# Altium PCB AX309.REV.1.0.PcbDoc (part 5 of 10)
Units mil, origin at the board's own origin, x right, y up, seen from the top; angles counter-clockwise.
Board outline 5185 x 3614 mil, 4 copper layers (Top Layer, GND, Mid-Layer 1, Bottom Layer); 191 components, 352 nets, 1106 pads, 425 vias.
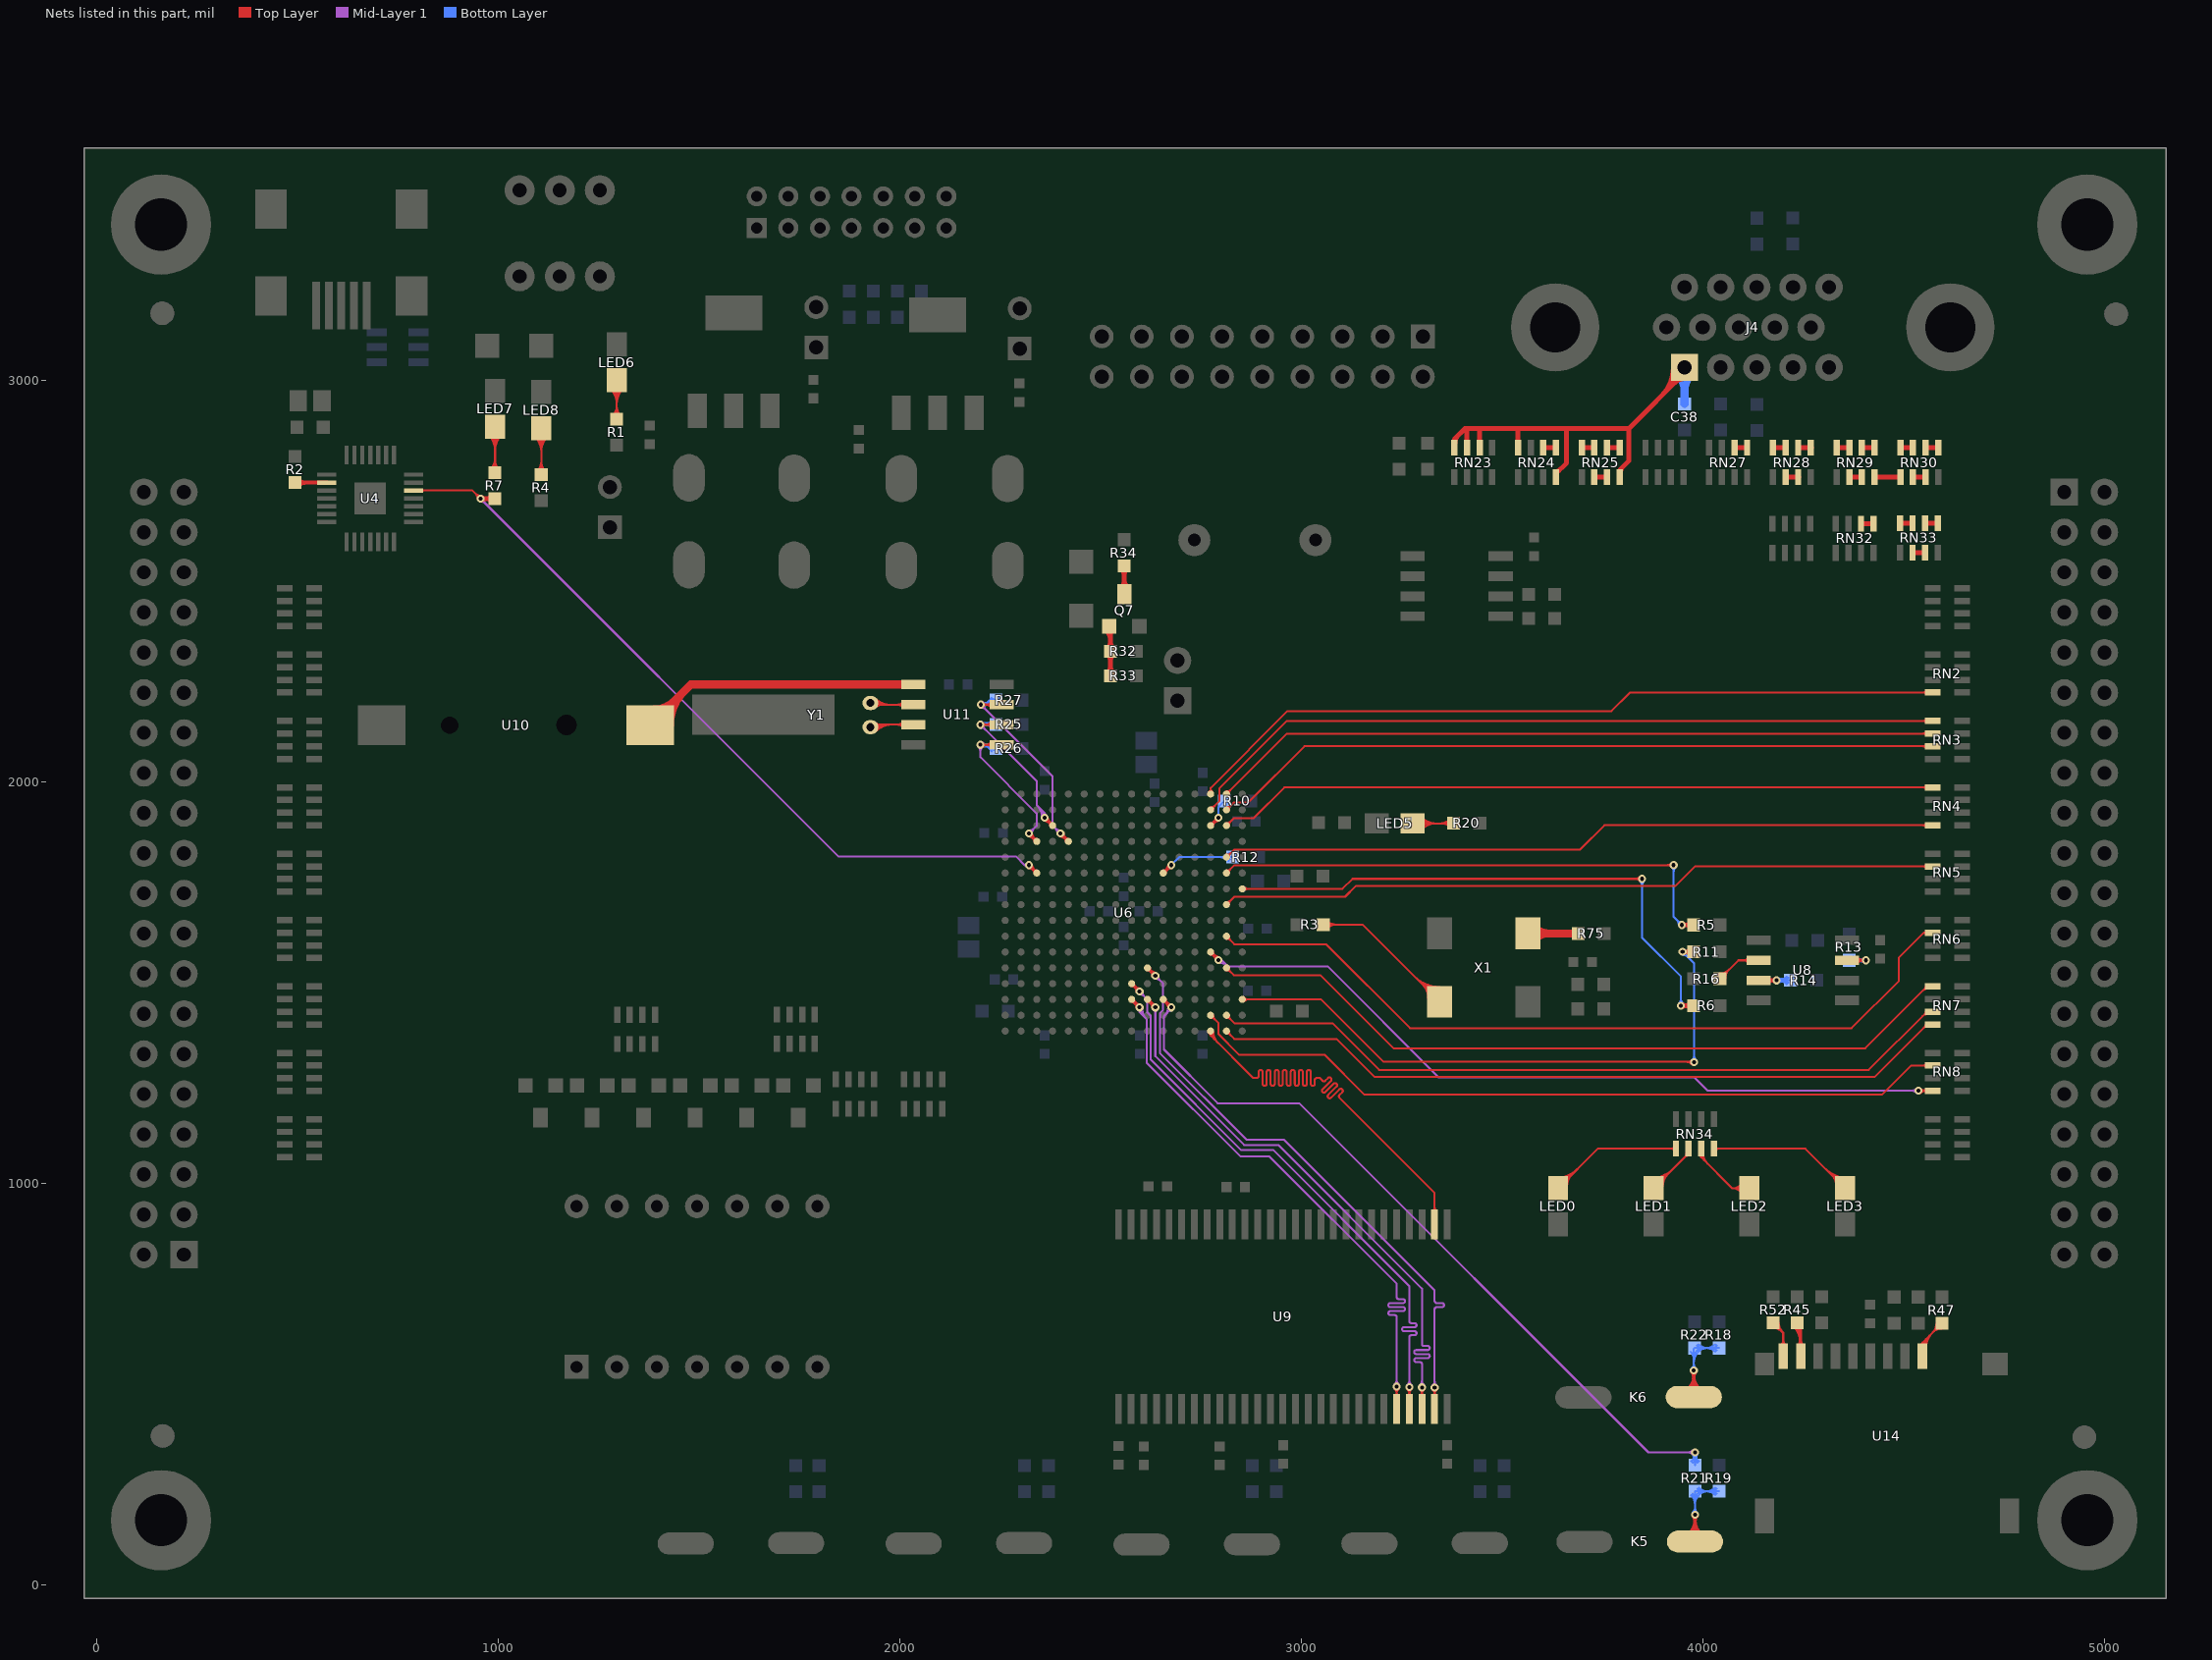
[diagram p7: the nets of this part, all layers, seen from the top]

## Via types
v1: diameter 20, hole 10, Top Layer to Bottom Layer, 328 vias
v2: diameter 30, hole 15, Top Layer to Bottom Layer, 95 vias
v3: diameter 40, hole 20, Top Layer to Bottom Layer, 2 vias

## Nets (pads, with @x,y where several pads share a name; then routed paths per layer and width w, separated by ;. In a path a pad name is that pad's centre, name@x,y a point inside that pad or via, vN(x,y) a via of type N, cw(c..) or ccw(c..) an arc to the next point about the centre after c; other vN are vias at no path point) (continued)
NetK5_1: K5.1 R19.2 R21.2 | length 782.9
  Top Layer w5: K5.1@3963.28,124.72 ccw(c3920.5,167.5) 3981,167.5 ccw(c4041.5,167.5) K5.1@3998.72,124.72 ; K5.1@3966.82,121.18 ccw(c3932.57,155.43) 3981,155.43 ccw(c4029.43,155.43) K5.1@3995.18,121.18 ; K5.1@3970.35,117.65 ccw(c3944.64,143.36) 3981,143.36 ccw(c4017.36,143.36) K5.1@3991.65,117.65 ; v1@3974.95,169.57 cw(c3957.6,156.87) 3978.85,153.58 ; v1@3975.7,168.7 cw(c3962.89,155.89) 3981,155.89 cw(c3999.11,155.89) v1@3986.3,168.7 ; v1@3976.57,167.95 cw(c3967.88,156.08) 3982.42,158.33 ; K5.1@3977,103 K5.1@3981,107 v1(3981,174) ; 3979.58,158.33 cw(c3994.12,156.08) v1@3985.43,167.95 ; 3983.15,153.58 cw(c4004.4,156.87) v1@3987.05,169.57
  Bottom Layer w5: R21.2@3971.45,222.45 cw(c3948.41,199.41) 3981,199.41 cw(c4013.59,199.41) 3990.55,222.45 cw(c4013.59,199.41) 4013.59,232 cw(c4013.59,264.59) R21.2@3990.55,241.55 ; R21.2@3974.99,225.99 cw(c3960.48,211.48) 3981,211.48 cw(c4001.52,211.48) 3987.01,225.99 cw(c4001.52,211.48) 4001.52,232 cw(c4001.52,252.52) R21.2@3987.01,238.01 ; v1@3975.7,179.3 ccw(c3962.89,192.11) 3981,192.11 ccw(c3999.11,192.11) v1@3986.3,179.3 ; v1(3981,174) R21.2@3981,232 R19.2@4041,232 ; R19.2@4031.45,222.45 ccw(c4008.41,199.41) 4008.41,232 ccw(c4008.41,264.59) R19.2@4031.45,241.55 ; R19.2@4034.99,225.99 ccw(c4020.48,211.48) 4020.48,232 ccw(c4020.48,252.52) R19.2@4034.99,238.01
NetK6_2: K6.2 R18.2 R22.2 | length 765.3
  Top Layer w5: K6.2@3960.28,484.72 ccw(c3917.5,527.5) 3978,527.5 ccw(c4038.5,527.5) K6.2@3995.72,484.72 ; K6.2@3963.82,481.18 ccw(c3929.57,515.43) 3978,515.43 ccw(c4026.43,515.43) K6.2@3992.18,481.18 ; K6.2@3967.35,477.65 ccw(c3941.64,503.36) 3978,503.36 ccw(c4014.36,503.36) K6.2@3988.65,477.65 ; v1@3971.91,528.62 cw(c3954.75,516.28) 3975.61,512.87 ; v1@3972.7,527.7 cw(c3959.89,514.89) 3978,514.89 cw(c3996.11,514.89) v1@3983.3,527.7 ; v1@3973.62,526.91 cw(c3964.82,514.67) 3979.7,517.1 ; 3976.3,517.1 cw(c3991.18,514.67) v1@3982.38,526.91 ; K6.2@3978,467 v1(3978,533) ; 3980.39,512.87 cw(c4001.25,516.28) v1@3984.09,528.62
  Bottom Layer w5: R22.2@3970.45,579.45 cw(c3952.24,561.24) 3978,561.24 ; v1@3972.7,538.3 ccw(c3959.89,551.11) 3978,551.11 ccw(c3996.11,551.11) v1@3983.3,538.3 ; v1(3978,533) 3978,587 R22.2@3980,589 R18.2@4041,589 ; 3978,551.58 cw(c4017.42,551.58) 3989.55,579.45 cw(c4012.59,556.41) 4012.59,589 cw(c4012.59,621.59) R22.2@3989.55,598.55 ; 3978,563.65 cw(c4005.35,563.65) 3986.01,582.99 cw(c4000.52,568.48) 4000.52,589 cw(c4000.52,609.52) R22.2@3986.01,595.01 ; R18.2@4031.45,579.45 ccw(c4008.41,556.41) 4008.41,589 ccw(c4008.41,621.59) R18.2@4031.45,598.55 ; R18.2@4034.99,582.99 ccw(c4020.48,568.48) 4020.48,589 ccw(c4020.48,609.52) R18.2@4034.99,595.01
NetLED0_1: LED0.1 RN34.5 | length 578.7
  Top Layer w5: LED0.1@3640,987 3738.85,1085.85 RN34.5@3933.51,1085.85 RN34.5@3933.51,1070.51 ; LED0.1@3640,999.5 ccw(c3640,1029.68) LED0.1@3661.34,1008.34 ; LED0.1@3640,1004.5 ccw(c3640,1046.75) 3669.87,1016.87 ; LED0.1@3640,1009.5 ccw(c3640,1063.82) 3678.41,1025.41 ; LED0.1@3640,1014.5 ccw(c3640,1080.89) 3686.95,1033.95 ; LED0.1@3657.5,992 cw(c3687.68,992) 3666.34,1013.34 ; LED0.1@3662.5,992 cw(c3704.75,992) 3674.87,1021.87 ; RN34.5@3929.71,1082.05 ccw(c3920.54,1072.88) 3920.54,1085.85 ccw(c3920.54,1098.82) RN34.5@3929.71,1089.65
NetLED1_1: LED1.1 RN34.6 | length 363.7
  Top Layer w5: LED1.1@3878.33,987 3965.01,1073.67 RN34.6@3965.01,1085.85 ; LED1.1@3878.33,999.5 ccw(c3878.33,1029.68) LED1.1@3899.67,1008.34 ; LED1.1@3878.33,1004.5 ccw(c3878.33,1046.75) 3908.21,1016.87 ; LED1.1@3878.33,1009.5 ccw(c3878.33,1063.82) 3916.74,1025.41 ; LED1.1@3878.33,1014.5 ccw(c3878.33,1080.89) 3925.28,1033.95 ; LED1.1@3895.83,992 cw(c3926.01,992) 3904.67,1013.34 ; LED1.1@3900.83,992 cw(c3943.08,992) 3913.21,1021.87 ; 3955.58,1064.24 ccw(c3945.78,1074.04) RN34.6@3959.63,1074.04 ; 3956.46,1065.12 cw(c3965.01,1056.57) RN34.6@3965.01,1068.66
NetLED2_1: LED2.1 RN34.7 | length 355.3
  Top Layer w5: RN34.7@3991.88,1074.04 ccw(c4003.75,1074.04) 3995.35,1065.65 ; RN34.7@3993.72,1069.44 cw(c3990.72,1064.5) 3996.5,1064.5 ; RN34.7@3996.5,1085.85 3996.5,1064.5 ; RN34.7@3996.88,1074.04 ccw(c4020.82,1074.04) 4003.89,1057.11 ; RN34.7@3999.29,1069.44 ccw(c4002.29,1064.5) 3996.5,1064.5 ; RN34.7@4001.88,1074.04 ccw(c4037.89,1074.04) 4012.43,1048.57 ; LED2.1@4098.1,974.29 ccw(c4074,957.8) 4074,987 ; LED2.1@4098.1,999.71 cw(c4074,1016.2) 4074,987 ; LED2.1@4102.23,977.12 ccw(c4083.48,964.29) 4083.48,987 ccw(c4083.48,1009.71) LED2.1@4102.23,996.88 ; LED2.1@4129.33,987 LED2.1@4116.67,987 4074,987 ; 3996.5,1064.5 4074,987
NetLED3_1: LED3.1 RN34.8 | length 606.7
  Top Layer w5: RN34.8@4028,1076 RN34.8@4028,1085.85 4256.15,1085.85 LED3.1@4355,987 ; RN34.8@4031.8,1082.05 cw(c4040.97,1072.88) 4040.97,1085.85 cw(c4040.97,1098.82) RN34.8@4031.8,1089.65 ; 4308.05,1033.95 ccw(c4355,1080.89) LED3.1@4355,1014.5 ; 4316.59,1025.41 ccw(c4355,1063.82) LED3.1@4355,1009.5 ; 4320.13,1021.87 cw(c4290.25,992) LED3.1@4332.5,992 ; 4325.13,1016.87 ccw(c4355,1046.75) LED3.1@4355,1004.5 ; 4328.66,1013.34 cw(c4307.32,992) LED3.1@4337.5,992 ; LED3.1@4333.66,1008.34 ccw(c4355,1029.68) LED3.1@4355,999.5
NetLED5_2: LED5.2 R20.2 | length 384.5
  Top Layer w5: LED5.2@3278,1896 R20.2@3380,1896 ; LED5.2@3291.84,1887.16 cw(c3313.18,1865.82) 3313.18,1896 cw(c3313.18,1926.18) LED5.2@3291.84,1904.84 ; LED5.2@3295.37,1883.63 cw(c3325.25,1853.75) 3325.25,1896 cw(c3325.25,1938.25) LED5.2@3295.37,1908.37 ; LED5.2@3298.91,1880.09 cw(c3337.32,1841.68) 3337.32,1896 cw(c3337.32,1950.32) LED5.2@3298.91,1911.91 ; 3344.99,1896 ccw(c3344.99,1932.01) R20.2@3370.45,1906.55 ; 3349.82,1896 cw(c3349.82,1866.82) R20.2@3370.45,1887.45 ; 3357.06,1896 ccw(c3357.06,1919.93) R20.2@3373.99,1903.01 ; 3361.89,1896 cw(c3361.89,1878.89) R20.2@3373.99,1890.99
NetLED6_1: LED6.1 R1.2 | length 379.5
  Top Layer w5: LED6.1@1279.09,2979.09 cw(c1240.68,2940.68) 1295,2940.68 cw(c1349.32,2940.68) LED6.1@1310.91,2979.09 ; LED6.1@1282.63,2982.63 cw(c1252.75,2952.75) 1295,2952.75 cw(c1337.25,2952.75) LED6.1@1307.37,2982.63 ; R1.2@1285.45,2912.55 ccw(c1262.41,2935.59) 1295,2935.59 ccw(c1327.59,2935.59) R1.2@1304.55,2912.55 ; LED6.1@1286.16,2986.16 cw(c1264.82,2964.82) 1295,2964.82 cw(c1325.18,2964.82) LED6.1@1303.84,2986.16 ; R1.2@1288.99,2909.01 ccw(c1274.48,2923.52) 1295,2923.52 ccw(c1315.52,2923.52) R1.2@1301.01,2909.01 ; R1.2@1295,2903 LED6.1@1295,3000
NetLED7_2: LED7.2 R7.2 | length 395.5
  Top Layer w5: LED7.2@976.09,2863.09 cw(c937.68,2824.68) 992,2824.68 cw(c1046.32,2824.68) LED7.2@1007.91,2863.09 ; LED7.2@979.63,2866.63 cw(c949.75,2836.75) 992,2836.75 cw(c1034.25,2836.75) LED7.2@1004.37,2866.63 ; R7.2@981.45,2779.55 ccw(c955.99,2805.01) 992,2805.01 ; LED7.2@983.16,2870.16 cw(c961.82,2848.82) 992,2848.82 cw(c1022.18,2848.82) LED7.2@1000.84,2870.16 ; R7.2@984.99,2776.01 ccw(c968.07,2792.93) 992,2792.93 ; R7.2@992,2771 LED7.2@992,2884 ; 992,2788.11 ccw(c1009.11,2788.11) R7.2@997.01,2776.01 ; 992,2800.18 ccw(c1021.18,2800.18) R7.2@1000.55,2779.55
NetLED8_2: LED8.2 R4.2 | length 398.2
  Top Layer w5: LED8.2@1091.09,2860.09 cw(c1052.68,2821.68) 1107,2821.68 cw(c1161.32,2821.68) LED8.2@1122.91,2860.09 ; LED8.2@1094.63,2863.63 cw(c1064.75,2833.75) 1107,2833.75 cw(c1149.25,2833.75) LED8.2@1119.37,2863.63 ; R4.2@1097.45,2774.85 ccw(c1074.41,2797.89) 1107,2797.89 ccw(c1139.59,2797.89) R4.2@1116.55,2774.85 ; LED8.2@1098.16,2867.16 cw(c1076.82,2845.82) 1107,2845.82 cw(c1137.18,2845.82) LED8.2@1115.84,2867.16 ; R4.2@1100.99,2771.31 ccw(c1086.48,2785.82) 1107,2785.82 ccw(c1127.52,2785.82) R4.2@1113.01,2771.31 ; R4.2@1107,2765.3 LED8.2@1107,2881
NetQ7_1: Q7.1 R32.2 R33.2 | length 279.3
  Top Layer w12: Q7.1@2513.51,2378.51 cw(c2485.79,2350.79) 2525,2350.79 ; R33.2@2517.93,2271.07 ccw(c2500.86,2288.14) 2525,2288.14 ccw(c2549.14,2288.14) R33.2@2532.07,2271.07 ; R32.2@2517.93,2317.93 cw(c2500.86,2300.86) 2525,2300.86 cw(c2549.14,2300.86) R32.2@2532.07,2317.93 ; R32.2@2517.93,2332.07 ccw(c2500.86,2349.14) 2525,2349.14 ccw(c2549.14,2349.14) R32.2@2532.07,2332.07 ; R33.2@2525,2264 R32.2@2525,2325 Q7.1@2525,2384 ; 2525,2365.27 cw(c2543.73,2365.27) Q7.1@2530.49,2378.51
NetQ7_3: Q7.3 R34.1 | length 153.4
  Top Layer w12: Q7.3@2551.51,2482.49 ccw(c2533.44,2500.56) 2559,2500.56 ; R34.1@2551.93,2530.93 cw(c2534.86,2513.86) 2559,2513.86 cw(c2583.14,2513.86) R34.1@2566.07,2530.93 ; Q7.3@2559,2468 R34.1@2559,2538 ; 2559,2505.38 ccw(c2591.38,2505.38) Q7.3@2568.49,2482.49
NetR2_1: R2.1 U4.9 | length 120.3
  Top Layer w10: R2.1@494.1,2745.1 U4.9@572.68,2745.1 ; R2.1@501.78,2737.22 cw(c520.8,2718.2) 520.8,2745.1 ; R2.1@501.78,2752.78 ccw(c520.31,2771.31) 520.31,2745.1
NetR3_2: R3.2 X1.3 | length 799.4
  Top Layer w5: R3.2@3055,1644 3153,1644 X1.3@3345,1452 ; R3.2@3061.01,1637.99 cw(c3075.52,1623.48) 3075.52,1644 cw(c3075.52,1664.52) R3.2@3061.01,1650.01 ; R3.2@3064.55,1634.45 cw(c3087.59,1611.41) 3087.59,1644 cw(c3087.59,1676.59) R3.2@3064.55,1653.55 ; 3282.06,1514.94 ccw(c3345,1577.88) X1.3@3345,1488.87 ; 3290.59,1506.41 ccw(c3345,1560.81) X1.3@3345,1483.87 ; 3299.13,1497.87 ccw(c3345,1543.74) X1.3@3345,1478.87 ; 3301.07,1495.93 cw(c3265.01,1459.87) X1.3@3316,1459.87 ; 3307.67,1489.33 ccw(c3345,1526.67) X1.3@3345,1473.87 ; 3309.6,1487.4 cw(c3282.08,1459.87) X1.3@3321,1459.87 ; X1.3@3316.2,1480.8 ccw(c3345,1509.6) X1.3@3345,1468.87 ; X1.3@3318.14,1478.86 cw(c3299.15,1459.87) X1.3@3326,1459.87
NetR5_1: R5.1 U6.R11 | length 1556.1
  Top Layer w5: U6.R11@2813.91,1772.43 2833.59,1792.11 v1(3927.89,1792.11) ; U6.R11@2813.91,1778.78 ccw(c2813.91,1794.13) 2824.76,1783.28 ccw(c2835.61,1772.43) U6.R11@2820.26,1772.43 ; v1@3922.59,1786.81 ccw(c3909.78,1774) 3909.78,1792.11 ccw(c3909.78,1810.22) v1@3922.59,1797.41 ; v1@3953.04,1637.44 cw(c3958.99,1630.87) 3961.29,1639.44 cw(c3963.59,1648.01) v1@3955.14,1645.29 ; v1@3953.04,1648.56 ccw(c3958.99,1655.13) 3961.29,1646.56 ccw(c3963.59,1637.99) v1@3955.14,1640.71 ; v1@3953.3,1637.7 cw(c3966.11,1624.89) 3966.11,1643 cw(c3966.11,1661.11) v1@3953.3,1648.3 ; R5.1@3967.9,1634.05 ccw(c3948,1616.42) v1(3948,1643) ; R5.1@3967.9,1651.95 cw(c3948,1669.58) v1(3948,1643) ; R5.1@3971.64,1637.36 ccw(c3959.11,1626.26) 3959.11,1643 ccw(c3959.11,1659.74) R5.1@3971.64,1648.64 ; R5.1@3978,1643 v1(3948,1643)
  Bottom Layer w5: v1@3922.59,1786.81 cw(c3909.78,1774) 3927.89,1774 cw(c3946,1774) v1@3933.19,1786.81 ; v1(3927.89,1792.11) 3927.89,1663.11 v1(3948,1643) ; v1@3940.5,1643 ccw(c3922.39,1643) 3935.2,1655.8 ccw(c3948,1668.61) v1@3948,1650.5
NetR6_1: R6.1 U6.T10 | length 1660.6
  Top Layer w5: U6.T10@2853.28,1733.06 3103.06,1733.06 3128,1758 v1(3849,1758) ; U6.T10@2857.77,1728.56 cw(c2868.63,1717.7) 2868.63,1733.06 cw(c2868.63,1748.41) U6.T10@2857.77,1737.55 ; v1@3843.7,1752.7 ccw(c3830.89,1739.89) 3830.89,1758 ccw(c3830.89,1776.11) v1@3843.7,1763.3 ; v1@3950.29,1435.85 cw(c3958.06,1424.68) 3961.59,1437.82 cw(c3965.11,1450.97) v1@3952.79,1445.19 ; v1@3950.29,1448.15 ccw(c3958.06,1459.32) 3961.59,1446.18 ccw(c3965.11,1433.03) v1@3952.79,1438.81 ; v1@3951.3,1436.7 cw(c3964.11,1423.89) 3964.11,1442 cw(c3964.11,1460.11) v1@3951.3,1447.3 ; R6.1@3968.33,1432.58 ccw(c3946,1410.83) v1(3946,1442) ; R6.1@3968.33,1451.42 cw(c3946,1473.17) v1(3946,1442) ; R6.1@3971.91,1436.07 ccw(c3957.85,1422.37) 3957.85,1442 ccw(c3957.85,1461.63) R6.1@3971.91,1447.93 ; R6.1@3978,1442 v1(3946,1442)
  Bottom Layer w5: v1@3843.7,1752.7 cw(c3830.89,1739.89) 3849,1739.89 cw(c3867.11,1739.89) v1@3854.3,1752.7 ; v1(3849,1758) 3849,1611.75 3946,1514.75 v1(3946,1442) ; v1@3940.7,1447.3 ccw(c3927.89,1460.11) 3946,1460.11 ccw(c3964.11,1460.11) v1@3951.3,1447.3
NetR10_2: R10.2 U6.P14 | length 227.8
  Top Layer w5: U6.P14@2774.54,1890.54 v1(2794.22,1910.22) ; U6.P14@2774.54,1896.89 ccw(c2774.54,1912.24) 2785.39,1901.39 ccw(c2796.24,1890.54) U6.P14@2780.89,1890.54 ; U6.P14@2776.89,1896.48 ccw(c2766.81,1913.94) v1@2786.79,1911.23 ; U6.P14@2780.48,1892.89 cw(c2797.94,1882.81) v1@2795.23,1902.79 ; 2783.77,1900.46 ccw(c2780.32,1906.44) v1@2786.98,1908.25 ; 2784.46,1899.77 cw(c2790.44,1896.32) v1@2792.25,1902.98 ; 2785.58,1901.72 cw(c2796.21,1895.58) v1@2794.56,1907.74 ; 2785.72,1901.58 ccw(c2779.58,1912.21) v1@2791.74,1910.56 ; v1@2786.72,1910.22 cw(c2768.61,1910.22) 2781.42,1897.42 cw(c2794.22,1884.61) v1@2794.22,1902.72 ; 2786.27,1902.92 ccw(c2780.15,1906.45) 2786.98,1908.28 cw(c2780.15,1906.45) 2786.27,1902.92 ; 2786.92,1902.27 cw(c2790.45,1896.15) 2792.28,1902.98 ccw(c2790.45,1896.15) 2786.92,1902.27
  Bottom Layer w5: v1(2794.22,1910.22) 2794.22,1937.22 R10.2@2809,1952
NetR11_1: R11.1 U6.T3 | length 1731.9
  Top Layer w5: U6.T3@2853.28,1457.46 3049.54,1457.46 3205,1302 v1@3979,1302 ; U6.T3@2857.77,1452.97 cw(c2868.63,1442.11) 2868.63,1457.46 cw(c2868.63,1472.81) U6.T3@2857.77,1461.96 ; v1@3955.3,1570.7 cw(c3968.11,1557.89) 3968.11,1576 cw(c3968.11,1594.11) v1@3955.3,1581.3 ; v1@3955.83,1571.29 cw(c3959.82,1568.07) 3961.14,1573.01 cw(c3962.47,1577.96) v1@3957.41,1577.17 ; v1@3955.83,1580.71 ccw(c3959.82,1583.93) 3961.14,1578.99 ccw(c3962.47,1574.04) v1@3957.41,1574.83 ; 3958.48,1302 cw(c3958.48,1280.48) v1@3973.7,1295.7 ; 3963.31,1302 ccw(c3963.31,1316.69) v1@3973.7,1306.3 ; R11.1@3967.44,1567.59 ccw(c3950,1553.72) v1(3950,1576) ; R11.1@3967.44,1584.41 cw(c3950,1598.28) v1(3950,1576) ; R11.1@3971.35,1570.71 ccw(c3960.37,1561.97) 3960.37,1576 ccw(c3960.37,1590.03) R11.1@3971.35,1581.29 ; R11.1@3978,1576 v1(3950,1576)
  Bottom Layer w5: v1@3950,1568.5 cw(c3950,1550.39) 3962.8,1563.2 cw(c3975.61,1576) v1@3957.5,1576 ; v1(3950,1576) 3979,1547 v1(3979,1301) ; v1@3973.7,1306.3 ccw(c3960.89,1319.11) 3979,1319.11 ccw(c3997.11,1319.11) v1@3984.3,1306.3
NetR12_2: R12.2 U6.L11 | length 424.5
  Top Layer w5: U6.L11@2656.43,1772.43 v1(2676.11,1792.11) ; U6.L11@2656.43,1778.78 ccw(c2656.43,1794.13) 2667.28,1783.28 ccw(c2678.13,1772.43) U6.L11@2662.78,1772.43 ; U6.L11@2658.78,1778.37 ccw(c2648.7,1795.83) v1@2668.68,1793.12 ; U6.L11@2662.37,1774.78 cw(c2679.83,1764.7) v1@2677.12,1784.68 ; 2665.66,1782.35 ccw(c2662.21,1788.33) v1@2668.87,1790.14 ; 2666.35,1781.66 cw(c2672.33,1778.21) v1@2674.14,1784.87 ; 2667.47,1783.61 cw(c2678.1,1777.47) v1@2676.45,1789.63 ; 2667.61,1783.47 ccw(c2661.47,1794.1) v1@2673.63,1792.45 ; v1@2668.61,1792.11 cw(c2650.5,1792.11) 2663.31,1779.31 cw(c2676.11,1766.5) v1@2676.11,1784.61 ; v1@2668.87,1790.17 cw(c2662.04,1788.34) 2668.16,1784.81 ccw(c2662.04,1788.34) v1@2668.87,1790.17 ; 2668.81,1784.16 cw(c2672.34,1778.04) 2674.17,1784.87 ccw(c2672.34,1778.04) 2668.81,1784.16
  Bottom Layer w5: v1(2676.11,1792.11) 2696,1812 R12.2@2829,1812 ; R12.2@2819.45,1802.45 ccw(c2796.41,1779.41) 2796.41,1812 ccw(c2796.41,1844.59) R12.2@2819.45,1821.55 ; R12.2@2822.99,1805.99 ccw(c2808.48,1791.48) 2808.48,1812 ccw(c2808.48,1832.52) R12.2@2822.99,1818.01
NetR13_1: R13.1 U8.7 | length 374.1
  Top Layer w5: U8.7@4360,1555 v1(4407,1555) ; U8.7@4384.72,1548.28 cw(c4400.94,1532.07) 4400.94,1555 cw(c4400.94,1577.93) U8.7@4384.72,1561.72 ; 4392.09,1552.63 cw(c4394.54,1543.5) v1@4401.49,1549.91 ; 4392.09,1557.37 ccw(c4394.54,1566.5) v1@4401.49,1560.09 ; 4392.76,1552.81 ccw(c4389.47,1565.12) v1@4400.5,1558.75 ; 4392.76,1557.19 cw(c4389.47,1544.88) v1@4400.5,1551.25 ; v1@4401.7,1549.7 ccw(c4388.89,1536.89) 4388.89,1555 ccw(c4388.89,1573.11) v1@4401.7,1560.3
  Bottom Layer w5: R13.1@4365,1555 v1(4407,1555) ; R13.1@4371.01,1548.99 cw(c4385.52,1534.48) 4385.52,1555 cw(c4385.52,1575.52) R13.1@4371.01,1561.01 ; R13.1@4374.55,1545.45 cw(c4397.59,1522.41) 4397.59,1555 cw(c4397.59,1587.59) R13.1@4374.55,1564.55 ; 4386.62,1552.3 cw(c4391.11,1534.05) v1@4402.47,1549.02 ; 4386.62,1557.7 ccw(c4391.11,1575.95) v1@4402.47,1560.98 ; 4394.16,1554.15 ccw(c4391.66,1564.27) v1@4400.58,1558.88 ; 4394.16,1555.85 cw(c4391.66,1545.73) v1@4400.58,1551.12 ; 4396.79,1554.8 cw(c4399.26,1544.79) v1@4405.49,1553.01 ; 4396.79,1555.2 ccw(c4399.26,1565.21) v1@4405.49,1556.99 ; v1@4401.7,1549.7 ccw(c4388.89,1536.89) 4388.89,1555 ccw(c4388.89,1573.11) v1@4401.7,1560.3
NetR14_1: R14.1 U8.3 | length 342.7
  Top Layer w5: U8.3@4140,1505 v1(4184,1505) ; U8.3@4164.72,1498.28 cw(c4180.94,1482.07) 4180.94,1505 cw(c4180.94,1527.93) U8.3@4164.72,1511.72 ; v1@4177.05,1502.19 ccw(c4168.37,1498.68) 4170.8,1507.72 ccw(c4172.75,1515.03) v1@4178.4,1509.99 ; v1@4177.05,1507.81 cw(c4168.37,1511.32) 4170.8,1502.28 cw(c4172.75,1494.97) v1@4178.4,1500.01 ; v1@4178.7,1499.7 ccw(c4165.89,1486.89) 4165.89,1505 ccw(c4165.89,1523.11) v1@4178.7,1510.3
  Bottom Layer w5: v1(4184,1505) R14.1@4219,1505 ; v1@4188.12,1498.73 cw(c4197.32,1484.72) 4201.66,1500.91 ; v1@4188.12,1511.27 ccw(c4197.32,1525.28) 4201.66,1509.09 ; v1@4189.3,1499.7 cw(c4202.11,1486.89) 4202.11,1505 cw(c4202.11,1523.11) v1@4189.3,1510.3 ; v1@4190.5,1501.25 cw(c4204.33,1493.26) 4200.2,1508.69 ; v1@4190.5,1508.75 ccw(c4204.33,1516.74) 4200.2,1501.31 ; R14.1@4209.45,1495.45 ccw(c4186.41,1472.41) 4186.41,1505 ccw(c4186.41,1537.59) R14.1@4209.45,1514.55 ; R14.1@4212.99,1498.99 ccw(c4198.48,1484.48) 4198.48,1505 ccw(c4198.48,1525.52) R14.1@4212.99,1511.01
NetR16_2: R16.2 U8.2 | length 235.5
  Top Layer w5: R16.2@4043,1509 4089,1555 U8.2@4140,1555 ; R16.2@4043,1517.5 ccw(c4043,1538.02) 4057.51,1523.51 ccw(c4072.02,1509) R16.2@4051.5,1509 ; R16.2@4043,1522.5 ccw(c4043,1555.09) 4066.05,1532.05 ccw(c4089.09,1509) R16.2@4056.5,1509 ; U8.2@4115.28,1548.28 ccw(c4099.06,1532.07) 4099.06,1555 ccw(c4099.06,1577.93) U8.2@4115.28,1561.72
NetR45_2: R45.2 U14.8 | length 259.4
  Top Layer w6: R45.2@4226.81,642.81 cw(c4184.26,600.26) U14.8@4244.43,600.26 ; R45.2@4231.05,647.05 cw(c4198.74,614.74) 4244.43,614.74 ; R45.2@4235.29,651.29 cw(c4213.23,629.23) 4244.43,629.23 ; R45.2@4236,652 4244.43,643.57 U14.8@4244.43,568.82 ; U14.8@4237.58,594.04 ccw(c4219.13,608.94) 4242.58,612.5 ; U14.8@4238.2,594.73 ccw(c4223.16,609.78) 4244.43,609.78 ccw(c4265.7,609.78) U14.8@4250.66,594.73 ; 4243.62,605.59 ccw(c4258.7,607.88) U14.8@4249.66,595.6
NetR47_2: R47.2 U14.1 | length 320.2
  Top Layer w5: U14.1@4541.89,588.5 cw(c4562.15,588.5) 4547.83,602.83 ; U14.1@4543.94,597.07 ccw(c4541.59,602.58) 4547.58,602.58 ; U14.1@4546.89,588.5 cw(c4579.22,588.5) 4556.36,611.36 ; U14.1@4547.58,568.82 4547.58,602.58 ; U14.1@4551.23,597.07 cw(c4553.57,602.58) 4547.58,602.58 ; U14.1@4551.89,588.5 cw(c4596.29,588.5) 4564.9,619.9 ; U14.1@4556.89,588.5 cw(c4613.36,588.5) 4573.43,628.43 ; R47.2@4582.5,651 cw(c4549.91,651) 4572.95,627.95 cw(c4596,604.91) R47.2@4596,637.5 ; R47.2@4587.5,651 cw(c4566.98,651) 4581.49,636.49 cw(c4596,621.98) R47.2@4596,642.5 ; R47.2@4596,651 4547.58,602.58
NetR52_2: R52.2 U14.9 | length 202.8
  Top Layer w6: R52.2@4176,639 cw(c4176,607.62) 4198.19,629.81 cw(c4220.38,652) R52.2@4189,652 ; R52.2@4176,645 cw(c4176,628.1) 4187.95,640.05 cw(c4199.9,652) R52.2@4183,652 ; R52.2@4176,652 4201.13,626.87 U14.9@4201.13,568.82 ; U14.9@4194.9,594.73 ccw(c4179.85,609.78) 4201.13,609.78 ccw(c4222.4,609.78) U14.9@4207.36,594.73
NetR75_1: R75.1 X1.1 | length 191.5
  Top Layer w20: X1.1@3565,1622 R75.1@3675,1622 ; X1.1@3580.2,1606.8 cw(c3616.9,1570.1) 3616.9,1622 cw(c3616.9,1673.9) X1.1@3580.2,1637.2
NetRN24_1: RN24.1 RN24.2 | length 31.5
  Top Layer w12: RN24.2@3603.22,2832 RN24.1@3634.71,2832
NetRN25_1: RN25.1 RN25.2 | length 31.5
  Top Layer w12: RN25.2@3761.93,2832 RN25.1@3793.43,2832
NetRN25_3: RN25.3 RN25.4 | length 31.5
  Top Layer w12: RN25.4@3698.94,2832 RN25.3@3730.44,2832
NetRN25_6: RN25.6 RN25.7 | length 31.5
  Top Layer w12: RN25.6@3730.44,2758.85 RN25.7@3761.93,2758.85
NetRN27_1: RN27.1 RN27.2 | length 31.5
  Top Layer w12: RN27.2@4079.36,2832 RN27.1@4110.86,2832
NetRN28_1: RN28.1 RN28.2 | length 31.5
  Top Layer w12: RN28.2@4239.5,2832 RN28.1@4271,2832
NetRN28_3: RN28.3 RN28.4 | length 31.5
  Top Layer w12: RN28.4@4176.51,2832 RN28.3@4208.01,2832
NetRN28_6: RN28.6 RN28.7 | length 31.5
  Top Layer w12: RN28.6@4208.01,2758.85 RN28.7@4239.5,2758.85
NetRN29_1: RN29.1 RN29.2 | length 31.5
  Top Layer w12: RN29.2@4396.5,2832 RN29.1@4428,2832
NetRN29_3: RN29.3 RN29.4 | length 31.5
  Top Layer w12: RN29.4@4333.51,2832 RN29.3@4365.01,2832
NetRN29_6: RN29.6 RN29.7 | length 31.5
  Top Layer w12: RN29.6@4365.01,2758.85 RN29.7@4396.5,2758.85
NetRN29_8: RN29.8 RN30.5 | length 64.5
  Top Layer w12: RN29.8@4428,2758.85 RN30.5@4492.51,2758.85
NetRN30_1: RN30.1 RN30.2 | length 31.5
  Top Layer w12: RN30.2@4555.5,2832 RN30.1@4587,2832
NetRN30_3: RN30.3 RN30.4 | length 31.5
  Top Layer w12: RN30.4@4492.51,2832 RN30.3@4524.01,2832
NetRN30_6: RN30.6 RN30.7 | length 31.5
  Top Layer w12: RN30.6@4524.01,2758.85 RN30.7@4555.5,2758.85
NetRN32_1: RN32.1 RN32.2 | length 31.5
  Top Layer w12: RN32.2@4394.5,2643 RN32.1@4426,2643
NetRN33_1: RN33.1 RN33.2 | length 31.5
  Top Layer w12: RN33.2@4554.5,2644 RN33.1@4586,2644
NetRN33_3: RN33.3 RN33.4 | length 31.5
  Top Layer w12: RN33.4@4491.51,2644 RN33.3@4523.01,2644
NetRN33_6: RN33.6 RN33.7 | length 31.5
  Top Layer w12: RN33.6@4523.01,2570.85 RN33.7@4554.5,2570.85
NetU10_1: U10.1 U11.1 | length 901
  Top Layer w20: U10.1@1378.63,2141 1479.63,2242 U11.1@2034,2242 ; U10.1@1388.47,2180.21 ccw(c1388.47,2251.12) 1438.61,2200.98 ; U10.1@1407.68,2141 cw(c1477.83,2141) 1428.23,2190.6 ; U10.1@1427.68,2141 cw(c1546.11,2141) 1462.37,2224.74
NetU11_2: U11.2 Y1.1 | length 245.8
  Top Layer w5: Y1.1@1931,2192 U11.2@2034,2192 ; Y1.1@1933.04,2199.54 ccw(c1951.23,2217.73) 1951.23,2192 ; Y1.1@1936.57,2203.07 ccw(c1963.3,2229.8) 1963.3,2192 ; Y1.1@1940.11,2185.39 cw(c1956.06,2169.44) 1956.06,2192 ; Y1.1@1940.11,2206.61 ccw(c1975.37,2241.87) 1975.37,2192 ; U11.2@2009.28,2185.28 ccw(c1993.07,2169.07) 1993.07,2192 ccw(c1993.07,2214.93) U11.2@2009.28,2198.72
NetU11_3: U11.3 Y1.2 | length 254.5
  Top Layer w5: Y1.2@1933,2142 U11.3@2034,2142 ; Y1.2@1933.04,2132.46 cw(c1956.06,2109.44) 1956.06,2142 ; Y1.2@1936.57,2128.93 cw(c1968.13,2097.37) 1968.13,2142 ; Y1.2@1940.11,2125.39 cw(c1980.2,2085.3) 1980.2,2142 ; Y1.2@1940.11,2146.61 ccw(c1951.23,2157.73) 1951.23,2142 ; U11.3@2009.28,2135.28 ccw(c1993.07,2119.07) 1993.07,2142 ccw(c1993.07,2164.93) U11.3@2009.28,2148.72
P2: RN8.2 U6.P2 | length 1971.4
  Top Layer w5: U6.P2@2774.54,1411.74 cw(c2774.54,1396.39) 2785.39,1407.24 cw(c2796.24,1418.09) U6.P2@2780.89,1418.09 ; U6.P2@2774.54,1418.09 2794,1398.63 2794,1371 2845,1320 3058,1320 3158,1220 4447,1220 4519.88,1292.88 RN8.2@4573,1292.88 ; RN8.2@4557.39,1289.08 ccw(c4548.22,1279.9) 4548.22,1292.88 ccw(c4548.22,1305.85) RN8.2@4557.39,1296.68
P6: RN8.4 U6.P6 | length 2225.6
  Top Layer w5: U6.P6@2774.54,1569.22 cw(c2774.54,1553.87) 2785.39,1564.72 cw(c2796.24,1575.57) U6.P6@2780.89,1575.57 ; U6.P6@2774.54,1575.57 v1(2794.22,1555.89) ; U6.P6@2776.89,1569.63 cw(c2766.81,1552.17) v1@2786.79,1554.88 ; U6.P6@2780.48,1573.22 ccw(c2797.94,1583.3) v1@2795.23,1563.32 ; 2783.77,1565.65 cw(c2780.32,1559.67) v1@2786.98,1557.86 ; 2784.46,1566.34 ccw(c2790.44,1569.79) v1@2792.25,1563.13 ; 2785.58,1564.39 ccw(c2796.21,1570.53) v1@2794.56,1558.37 ; 2785.72,1564.53 cw(c2779.58,1553.9) v1@2791.74,1555.55 ; v1@2786.72,1555.89 ccw(c2768.61,1555.89) 2781.42,1568.69 ccw(c2794.22,1581.5) v1@2794.22,1563.39 ; v1(4538,1230) RN8.4@4572.89,1230 ; v1@4543.3,1224.7 cw(c4556.11,1211.89) 4556.11,1230 cw(c4556.11,1248.11) v1@4543.3,1235.3 ; v1@4544.5,1233.75 ccw(c4552.57,1238.41) 4550.16,1229.41 ; v1@4544.78,1226.8 cw(c4549.09,1224.77) 4550.32,1229.36 ; v1@4547.94,1230 cw(c4547.94,1216.64) RN8.4@4557.39,1226.09 ; 4548.49,1230 ccw(c4548.49,1242.59) RN8.4@4557.39,1233.69 ; v1@2786.98,1557.83 ccw(c2780.15,1559.66) 2786.27,1563.19 cw(c2780.15,1559.66) v1@2786.98,1557.83 ; 2786.92,1563.84 ccw(c2790.45,1569.96) 2792.28,1563.13 cw(c2790.45,1569.96) 2786.92,1563.84
  Mid-Layer 1 w5: v1(2794.22,1555.89) 2801.11,1555.89 2817,1540 ; v1@2794.38,1553.39 cw(c2795.62,1534.25) 2809.19,1547.81 ; v1@2794.7,1548.4 cw(c2796.57,1519.57) 2817,1540 ; v1@4532.7,1224.7 ccw(c4519.89,1211.89) 4519.89,1230 ccw(c4519.89,1248.11) v1@4532.7,1235.3 ; v1(4538,1230) 4013,1230 3980,1263 3343,1263 3066,1540 2817,1540
P15: RN3.1 U6.P15 | length 1953.2
  Top Layer w5: U6.P15@2774.54,1929.91 2796,1951.37 2796,1983 2964.25,2151.25 RN3.1@4573,2151.25 ; U6.P15@2774.54,1936.26 ccw(c2774.54,1951.61) 2785.39,1940.76 ccw(c2796.24,1929.91) U6.P15@2780.89,1929.91 ; RN3.1@4557.39,2147.45 ccw(c4548.22,2138.28) 4548.22,2151.25 ccw(c4548.22,2164.22) RN3.1@4557.39,2155.05
P16: RN2.4 U6.P16 | length 1956.4
  Top Layer w5: U6.P16@2770.06,1973.79 ccw(c2759.4,1984.53) 2774.54,1984.53 ; U6.P16@2774.54,1969.28 2774.54,1984.54 ; U6.P16@2779.01,1973.79 cw(c2789.67,1984.53) 2774.54,1984.53 ; RN2.4@4557.39,2218.34 ccw(c4548.22,2209.16) 4548.22,2222.14 ccw(c4548.22,2235.11) RN2.4@4557.39,2225.94 ; RN2.4@4573,2222.14 3819.14,2222.14 3773,2176 2966,2176 2774.54,1984.54
R1: RN7.4 U6.R1 | length 1905.5
  Top Layer w5: U6.R1@2813.91,1372.37 cw(c2813.91,1357.02) 2824.76,1367.87 cw(c2835.61,1378.72) U6.R1@2820.26,1378.72 ; U6.R1@2813.91,1378.72 2833.63,1359 3088,1359 3183,1264 4428,1264 4559.26,1395.26 RN7.4@4573,1395.26 ; 4548.72,1384.72 cw(c4561.19,1372.26) RN7.4@4561.19,1389.89 ; RN7.4@4553.38,1389.38 ccw(c4547.49,1395.26) RN7.4@4555.82,1395.26
R2: RN7.3 U6.R2 | length 1919.9
  Top Layer w5: U6.R2@2813.91,1411.74 cw(c2813.91,1396.39) 2824.76,1407.24 cw(c2835.61,1418.09) U6.R2@2820.26,1418.09 ; U6.R2@2813.91,1418.09 2834,1398 3078,1398 3194,1282 4414,1282 4558.76,1426.76 RN7.3@4573,1426.76 ; 4547.86,1415.86 cw(c4561.19,1402.54) RN7.3@4561.19,1421.38 ; RN7.3@4553.73,1421.73 ccw(c4548.71,1426.76) RN7.3@4555.82,1426.76
R5: RN7.1 U6.R5 | length 1950.2
  Top Layer w5: U6.R5@2813.91,1529.85 cw(c2813.91,1514.5) 2824.76,1525.35 cw(c2835.61,1536.2) U6.R5@2820.26,1536.2 ; U6.R5@2813.91,1536.2 2832.11,1518 3048,1518 3230,1336 4405,1336 4558.75,1489.75 RN7.1@4573,1489.75 ; 4547.85,1478.85 cw(c4561.19,1465.51) RN7.1@4561.19,1484.38 ; RN7.1@4553.74,1484.74 ccw(c4548.73,1489.75) RN7.1@4555.81,1489.75
R7: RN6.2 U6.R7 | length 2024.9
  Top Layer w5: U6.R7@2813.91,1608.59 cw(c2813.91,1593.24) 2824.76,1604.09 cw(c2835.61,1614.94) U6.R7@2820.26,1614.94 ; U6.R7@2813.91,1614.94 2833.59,1595.26 3061.74,1595.26 3271,1386 4371,1386 4489,1504 4489,1562 4550.63,1623.63 ; RN6.2@4556.84,1620.47 ccw(c4550.63,1615.94) 4550.63,1623.63 ; RN6.2@4556.84,1626.79 cw(c4550.63,1631.32) 4550.63,1623.63 ; RN6.2@4573,1623.63 4550.63,1623.63
R9: RN5.2 U6.R9 | length 1843.1
  Top Layer w5: U6.R9@2813.91,1693.68 2833.59,1713.37 3109.37,1713.37 3136,1740 3932,1740 3981,1789 RN5.2@4573,1789 ; U6.R9@2813.91,1700.04 ccw(c2813.91,1715.39) 2824.76,1704.54 ccw(c2835.61,1693.68) U6.R9@2820.26,1693.68 ; RN5.2@4557.39,1785.2 ccw(c4548.22,1776.03) 4548.22,1789 ccw(c4548.22,1801.98) RN5.2@4557.39,1792.8
R12: RN4.4 U6.R12 | length 1836.6
  Top Layer w5: U6.R12@2813.91,1811.8 2833.11,1831 3695,1831 3755.39,1891.39 RN4.4@4573,1891.39 ; U6.R12@2813.91,1818.15 ccw(c2813.91,1833.5) 2824.76,1822.65 ccw(c2835.61,1811.8) U6.R12@2820.26,1811.8 ; RN4.4@4557.39,1887.59 ccw(c4548.22,1878.41) 4548.22,1891.39 ccw(c4548.22,1904.36) RN4.4@4557.39,1895.19
R14: RN4.1 U6.R14 | length 1843.1
  Top Layer w5: U6.R14@2813.91,1890.54 2832.37,1909 2881,1909 2957.88,1985.88 RN4.1@4573,1985.88 ; U6.R14@2813.91,1896.89 ccw(c2813.91,1912.24) 2824.76,1901.39 ccw(c2835.61,1890.54) U6.R14@2820.26,1890.54 ; RN4.1@4557.39,1982.08 ccw(c4548.22,1972.9) 4548.22,1985.88 ccw(c4548.22,1998.85) RN4.1@4557.39,1989.67
R15: RN3.3 U6.R15 | length 1869.2
  Top Layer w5: U6.R15@2813.91,1929.91 2832,1948 2868,1948 3008.26,2088.26 RN3.3@4573,2088.26 ; U6.R15@2813.91,1936.26 ccw(c2813.91,1951.61) 2824.76,1940.76 ccw(c2835.61,1929.91) U6.R15@2820.26,1929.91 ; RN3.3@4557.39,2084.46 ccw(c4548.22,2075.28) 4548.22,2088.26 ccw(c4548.22,2101.23) RN3.3@4557.39,2092.06
R16: RN3.2 U6.R16 | length 1865.9
  Top Layer w5: U6.R16@2813.91,1969.28 2964.38,2119.75 RN3.2@4573,2119.75 ; U6.R16@2813.91,1975.63 ccw(c2813.91,1990.98) 2824.76,1980.13 ccw(c2835.61,1969.28) U6.R16@2820.26,1969.28 ; RN3.2@4557.39,2115.95 ccw(c4548.22,2106.78) 4548.22,2119.75 ccw(c4548.22,2132.73) RN3.2@4557.39,2123.55
RED: C38.1 J4.1 RN23.2 RN23.3 RN23.4 RN24.4 RN24.8 RN25.8 | length 1503.2
  Top Layer w12: RN23.4@3381.51,2832 3381.51,2853.51 3408,2880 3661,2880 ; RN23.4@3383.39,2843.81 cw(c3411.33,2843.81) 3391.57,2863.57 ; RN23.3@3413.01,2832 3413.01,2878.01 ; RN23.2@3444.5,2832 3444.5,2879.5 ; RN24.4@3540.23,2832 3540.23,2879.23 ; RN24.8@3634.71,2758.85 3634.71,2767.71 3661,2794 3661,2880 ; RN24.8@3634.71,2772.54 ccw(c3634.71,2784.17) 3642.94,2775.94 ; RN25.8@3793.43,2758.85 3793.43,2776.43 3816.5,2799.5 3816.5,2880 ; RN25.8@3795.3,2770.66 cw(c3813.75,2770.66) 3800.71,2783.71 ; 3897.66,2961.16 ccw(c3826.81,3032) J4.1@3927,3032 ; 3918.14,2981.64 ccw(c3867.78,3032) J4.1@3939,3032 ; 3930.25,2993.75 cw(c3955,2968.99) J4.1@3955,3004 ; J4.1@3938.63,3002.13 ccw(c3908.75,3032) J4.1@3951,3032 ; J4.1@3955,3032 3955,3018.5 3816.5,2880 ; 3661,2880 3739.5,2880 3816.5,2880
  Bottom Layer w20: J4.1@3938.03,3015.03 cw(c3897.06,2974.06) 3955,2974.06 cw(c4012.94,2974.06) J4.1@3971.97,3015.03 ; C38.1@3955,2941 J4.1@3955,3032
RESET: R21.1 U6.L3 | length 2288.6
  Top Layer w5: U6.L3@2656.43,1451.11 cw(c2656.43,1435.76) 2667.28,1446.61 cw(c2678.13,1457.46) U6.L3@2662.78,1457.46 ; U6.L3@2656.43,1457.46 v1(2676.11,1437.78) ; U6.L3@2658.78,1451.52 cw(c2648.7,1434.06) v1@2668.68,1436.77 ; U6.L3@2662.37,1455.11 ccw(c2679.83,1465.19) v1@2677.12,1445.21 ; 2665.66,1447.54 cw(c2662.21,1441.56) v1@2668.87,1439.75 ; 2666.35,1448.23 ccw(c2672.33,1451.68) v1@2674.14,1445.02 ; 2667.47,1446.28 ccw(c2678.1,1452.42) v1@2676.45,1440.26 ; 2667.61,1446.42 cw(c2661.47,1435.79) v1@2673.63,1437.44 ; v1@2668.61,1437.78 ccw(c2650.5,1437.78) 2663.31,1450.58 ccw(c2676.11,1463.39) v1@2676.11,1445.28 ; v1@2674.17,1445.02 cw(c2672.34,1451.85) 2668.81,1445.73 ccw(c2672.34,1451.85) v1@2674.17,1445.02 ; 2668.16,1445.08 cw(c2662.04,1441.55) 2668.87,1439.72 ccw(c2662.04,1441.55) 2668.16,1445.08
  Mid-Layer 1 w5: 2660.71,1418.71 ccw(c2641.65,1437.78) v1@2668.61,1437.78 ; 2669.25,1427.25 ccw(c2658.72,1437.78) v1@2673.61,1437.78 ; 2669.57,1427.57 cw(c2676.11,1421.03) v1@2676.11,1430.28 ; v1(2676.11,1437.78) 2676.11,1434.11 2658,1416 2658,1333 2792,1199 2995,1199 3865,329 v1(3981,329) ; v1@3975.7,323.7 ccw(c3962.89,310.89) 3962.89,329 ccw(c3962.89,347.11) v1@3975.7,334.3
  Bottom Layer w5: R21.1@3971.58,306.67 ccw(c3949.83,329) v1(3981,329) ; v1@3974.85,324.71 cw(c3963.68,316.94) 3976.82,313.41 cw(c3989.97,309.89) v1@3984.19,322.21 ; R21.1@3975.07,303.09 ccw(c3961.37,317.15) 3981,317.15 ccw(c4000.63,317.15) R21.1@3986.93,303.09 ; v1@3975.7,323.7 cw(c3962.89,310.89) 3981,310.89 cw(c3999.11,310.89) v1@3986.3,323.7 ; v1@3977.81,322.21 cw(c3972.03,309.89) 3985.18,313.41 cw(c3998.32,316.94) v1@3987.15,324.71 ; R21.1@3981,297 v1(3981,329) ; R21.1@3990.42,306.67 cw(c4012.17,329) v1(3981,329)
RTC_DATA: R25.2 U6.D14 U11.6 | length 870.4
  Top Layer w5: v1@2200,2141 v1(2201,2142) U11.6@2254,2142 ; v1@2206.3,2136.7 cw(c2219.11,2123.89) 2219.11,2142 cw(c2219.11,2160.11) v1@2206.3,2147.3 ; U11.6@2229.28,2135.28 ccw(c2213.07,2119.07) 2213.07,2142 ccw(c2213.07,2164.93) U11.6@2229.28,2148.72 ; v1@2360.14,1902.79 cw(c2357.43,1882.81) U6.D14@2374.89,1892.89 ; v1@2360.81,1907.74 cw(c2359.16,1895.58) 2369.79,1901.72 ; v1@2361.15,1902.72 cw(c2361.15,1884.61) 2373.95,1897.42 cw(c2386.76,1910.22) v1@2368.65,1910.22 ; v1(2361.15,1910.22) U6.D14@2380.83,1890.54 ; v1@2363.63,1910.56 ccw(c2375.79,1912.21) 2369.65,1901.58 ; v1@2368.39,1908.25 ccw(c2375.05,1906.44) 2371.6,1900.46 ; v1@2368.58,1911.23 ccw(c2388.56,1913.94) U6.D14@2378.48,1896.48 ; 2370.91,1899.77 ccw(c2364.93,1896.32) v1@2363.12,1902.98 ; U6.D14@2374.48,1890.54 ccw(c2359.13,1890.54) 2369.98,1901.39 ccw(c2380.83,1912.24) U6.D14@2380.83,1896.89 ; v1@2363.09,1902.98 cw(c2364.92,1896.15) 2368.45,1902.27 ccw(c2364.92,1896.15) v1@2363.09,1902.98 ; v1@2368.39,1908.28 ccw(c2375.22,1906.45) 2369.1,1902.92 cw(c2375.22,1906.45) v1@2368.39,1908.28
  Mid-Layer 1 w5: v1@2201,2134.5 cw(c2201,2116.39) 2213.8,2129.2 cw(c2226.61,2142) v1@2208.5,2142 ; v1(2201,2142) 2341.46,2001.54 2341.46,1941.54 ; 2349.57,1933.43 cw(c2327.61,1911.46) v1@2358.65,1910.31 ; v1@2353.65,1910.5 ccw(c2311.97,1912.04) 2341.47,1941.53 ; 2357.68,1925.32 cw(c2343.25,1910.88) v1@2363.65,1910.13 ; v1@2358.05,1917.05 ccw(c2355.88,1921.85) 2361.15,1921.85 ; v1(2361.15,1910.22) 2361.15,1921.85 ; v1@2364.24,1917.05 cw(c2366.41,1921.85) 2361.15,1921.85 ; 2341.46,1941.54 2361.15,1921.85
  Bottom Layer w6: v1(2201,2142) R25.2@2239,2142 ; v1@2204.5,2148.06 ccw(c2215.25,2166.68) 2220.81,2145.91 ; v1@2205.95,2137.05 cw(c2217.9,2125.1) 2217.9,2142 cw(c2217.9,2158.9) v1@2205.95,2146.95 ; v1@2206.2,2142 ccw(c2206.2,2176.8) R25.2@2230.81,2152.19 ; v1@2207.06,2138.5 cw(c2217.72,2132.35) 2214.53,2144.23 ; 2211.03,2142 cw(c2211.03,2114.03) R25.2@2230.81,2133.81 ; 2220.69,2142 ccw(c2220.69,2162.31) R25.2@2235.05,2147.95
RTC_NRST: R26.2 U6.C13 U11.5 | length 817.6
  Top Layer w5: v1(2201,2092) U11.5@2254,2092 ; v1@2206.3,2086.7 cw(c2219.11,2073.89) 2219.11,2092 cw(c2219.11,2110.11) v1@2206.3,2097.3 ; U11.5@2229.28,2085.28 ccw(c2213.07,2069.07) 2213.07,2092 ccw(c2213.07,2114.93) U11.5@2229.28,2098.72 ; v1@2320.77,1863.42 cw(c2318.06,1843.44) U6.C13@2335.52,1853.52 ; v1@2321.44,1868.37 cw(c2319.79,1856.21) 2330.42,1862.35 ; v1@2321.78,1863.35 cw(c2321.78,1845.24) 2334.58,1858.05 cw(c2347.39,1870.85) v1@2329.28,1870.85 ; v1(2321.78,1870.85) U6.C13@2341.46,1851.17 ; v1@2323.75,1863.61 cw(c2325.56,1856.95) 2331.54,1860.4 ; v1@2324.26,1871.19 ccw(c2336.42,1872.84) 2330.28,1862.21 ; v1@2329.21,1871.86 ccw(c2349.19,1874.57) U6.C13@2339.11,1857.11 ; 2332.23,1861.09 cw(c2335.68,1867.07) v1@2329.02,1868.88 ; U6.C13@2335.11,1851.17 ccw(c2319.76,1851.17) 2330.61,1862.02 ccw(c2341.46,1872.87) U6.C13@2341.46,1857.52 ; v1@2329.02,1868.91 ccw(c2335.85,1867.08) 2329.73,1863.55 cw(c2335.85,1867.08) v1@2329.02,1868.91 ; v1@2323.72,1863.61 cw(c2325.55,1856.78) 2329.08,1862.9 ccw(c2325.55,1856.78) v1@2323.72,1863.61
  Mid-Layer 1 w5: v1@2195.7,2086.7 cw(c2182.89,2073.89) 2201,2073.89 cw(c2219.11,2073.89) v1@2206.3,2086.7 ; v1(2201,2092) 2201,2061 2341,1921 2341,1890.07 v1(2321.78,1870.85) ; v1@2321.78,1878.35 ccw(c2321.78,1896.46) 2334.58,1883.65 ccw(c2347.39,1870.85) v1@2329.28,1870.85
  Bottom Layer w6: v1@2204.51,2085.94 cw(c2212.94,2071.41) 2217.28,2087.64 cw(c2221.63,2103.86) v1@2207.07,2095.49 ; v1@2205.95,2087.05 cw(c2217.9,2075.1) 2217.9,2092 cw(c2217.9,2108.9) v1@2205.95,2096.95 ; 2211.64,2092 cw(c2211.64,2065.86) R26.2@2234.01,2079.38 ; 2222.27,2092 cw(c2222.27,2072.29) R26.2@2239.14,2082.48 ; R26.2@2228.87,2076.28 ccw(c2201,2059.43) v1(2201,2092) 2231,2092 R26.2@2240,2083
RTC_SCLK: R27.2 U6.E13 U11.7 | length 935.9
  Top Layer w5: v1(2202,2192) U11.7@2254,2192 ; v1@2207.3,2186.7 cw(c2220.11,2173.89) 2220.11,2192 cw(c2220.11,2210.11) v1@2207.3,2197.3 ; U11.7@2229.28,2185.28 ccw(c2213.07,2169.07) 2213.07,2192 ccw(c2213.07,2214.93) U11.7@2229.28,2198.72 ; v1@2399.51,1863.42 cw(c2396.8,1843.44) U6.E13@2414.26,1853.52 ; v1@2400.18,1868.37 cw(c2398.53,1856.21) 2409.16,1862.35 ; v1@2400.52,1863.35 cw(c2400.52,1845.24) 2413.32,1858.05 cw(c2426.13,1870.85) v1@2408.02,1870.85 ; v1(2400.52,1870.85) U6.E13@2420.2,1851.17 ; v1@2402.49,1863.61 cw(c2404.3,1856.95) 2410.28,1860.4 ; v1@2403,1871.19 ccw(c2415.16,1872.84) 2409.02,1862.21 ; v1@2407.95,1871.86 ccw(c2427.93,1874.57) U6.E13@2417.85,1857.11 ; 2410.97,1861.09 cw(c2414.42,1867.07) v1@2407.76,1868.88 ; U6.E13@2413.85,1851.17 ccw(c2398.5,1851.17) 2409.35,1862.02 ccw(c2420.2,1872.87) U6.E13@2420.2,1857.52 ; v1@2407.76,1868.91 ccw(c2414.59,1867.08) 2408.47,1863.55 cw(c2414.59,1867.08) v1@2407.76,1868.91 ; v1@2402.46,1863.61 cw(c2404.29,1856.78) 2407.82,1862.9 ccw(c2404.29,1856.78) v1@2402.46,1863.61
  Mid-Layer 1 w5: v1@2202,2184.5 cw(c2202,2166.39) 2214.8,2179.2 cw(c2227.61,2192) v1@2209.5,2192 ; v1(2202,2192) 2381,2013 2381,1890.37 v1(2400.52,1870.85) ; v1@2393.02,1870.85 ccw(c2374.91,1870.85) 2387.72,1883.65 ccw(c2400.52,1896.46) v1@2400.52,1878.35
  Bottom Layer w6: v1@2206,2197.74 ccw(c2213.26,2208.15) 2216.54,2195.9 ccw(c2219.83,2183.64) v1@2208.34,2189.03 ; v1@2206.63,2197.25 ccw(c2216,2207.87) 2219.67,2194.19 ; v1@2206.95,2187.05 cw(c2218.9,2175.1) 2218.9,2192 cw(c2218.9,2208.9) v1@2206.95,2196.95 ; v1@2208.06,2188.5 cw(c2215.43,2184.25) 2213.23,2192.46 ; v1@2211.5,2192 ccw(c2211.5,2216.56) R27.2@2233.68,2206.01 ; 2221,2192 ccw(c2221,2212.04) R27.2@2239.1,2203.43 ; R27.2@2228.26,2208.59 cw(c2202,2221.08) v1(2202,2192) R27.2@2229,2192
RXD: R7.1 U4.26 U6.C11 | length 2376.9
  Top Layer w5: U4.26@789.21,2725.42 935.58,2725.42 v1(956,2705) R7.1@991,2705 ; U4.26@809.51,2723.43 cw(c814.32,2718.62) 814.32,2725.42 cw(c814.32,2732.21) U4.26@809.51,2727.41 ; v1@948.5,2705 ccw(c930.39,2705) 943.2,2717.8 ccw(c956,2730.61) v1@956,2712.5 ; v1@960.12,2698.73 cw(c969.32,2684.72) 973.66,2700.91 ; v1@960.12,2711.27 ccw(c969.32,2725.28) 973.66,2709.09 ; v1@961.3,2699.7 cw(c974.11,2686.89) 974.11,2705 cw(c974.11,2723.11) v1@961.3,2710.3 ; v1@962.5,2701.25 cw(c976.33,2693.26) 972.2,2708.69 ; v1@962.5,2708.75 ccw(c976.33,2716.74) 972.2,2701.31 ; R7.1@981.45,2695.45 ccw(c958.41,2672.41) 958.41,2705 ccw(c958.41,2737.59) R7.1@981.45,2714.55 ; R7.1@984.99,2698.99 ccw(c970.48,2684.48) 970.48,2705 ccw(c970.48,2725.52) R7.1@984.99,2711.01 ; v1@2320.77,1784.68 cw(c2318.06,1764.7) U6.C11@2335.52,1774.78 ; v1@2321.44,1789.63 cw(c2319.79,1777.47) 2330.42,1783.61 ; v1@2321.78,1784.61 cw(c2321.78,1766.5) 2334.58,1779.31 cw(c2347.39,1792.11) v1@2329.28,1792.11 ; v1(2321.78,1792.11) U6.C11@2341.46,1772.43 ; v1@2323.75,1784.87 cw(c2325.56,1778.21) 2331.54,1781.66 ; v1@2324.26,1792.45 ccw(c2336.42,1794.1) 2330.28,1783.47 ; v1@2329.21,1793.12 ccw(c2349.19,1795.83) U6.C11@2339.11,1778.37 ; 2332.23,1782.35 cw(c2335.68,1788.33) v1@2329.02,1790.14 ; U6.C11@2335.11,1772.43 ccw(c2319.76,1772.43) 2330.61,1783.28 ccw(c2341.46,1794.13) U6.C11@2341.46,1778.78 ; v1@2329.02,1790.17 ccw(c2335.85,1788.34) 2329.73,1784.81 cw(c2335.85,1788.34) v1@2329.02,1790.17 ; v1@2323.72,1784.87 cw(c2325.55,1778.04) 2329.08,1784.16 ccw(c2325.55,1778.04) v1@2323.72,1784.87
  Mid-Layer 1 w5: v1@956,2697.5 cw(c956,2679.39) 968.8,2692.2 cw(c981.61,2705) v1@963.5,2705 ; v1(956,2705) 1847,1814 2289,1814 2310.89,1792.11 ; v1@2314.77,1789.44 ccw(c2310.89,1787.96) 2310.89,1792.11 ; v1@2314.77,1794.79 cw(c2310.89,1796.27) 2310.89,1792.11 ; v1(2321.78,1792.11) 2310.89,1792.11
S_A0: U6.J3 U9.23 | length 1798.3
  Top Layer w5: U6.J3@2577.68,1451.11 cw(c2577.68,1435.76) 2588.54,1446.61 cw(c2599.39,1457.46) U6.J3@2584.04,1457.46 ; U6.J3@2577.68,1457.46 v1(2597.37,1437.78) ; U6.J3@2580.04,1451.52 cw(c2569.96,1434.06) v1@2589.94,1436.77 ; U6.J3@2583.63,1455.11 ccw(c2601.09,1465.19) v1@2598.38,1445.21 ; 2586.92,1447.54 cw(c2583.47,1441.56) v1@2590.13,1439.75 ; 2587.61,1448.23 ccw(c2593.59,1451.68) v1@2595.4,1445.02 ; 2588.73,1446.28 ccw(c2599.36,1452.42) v1@2597.71,1440.26 ; 2588.87,1446.42 cw(c2582.73,1435.79) v1@2594.89,1437.44 ; v1@2589.87,1437.78 ccw(c2571.76,1437.78) 2584.57,1450.58 ccw(c2597.37,1463.39) v1@2597.37,1445.28 ; v1@3232.61,487.61 cw(c3219.81,474.81) 3237.91,474.81 cw(c3256.02,474.81) v1@3243.22,487.61 ; U9.23@3233.67,470.24 ccw(c3223.43,480.49) 3237.91,480.49 ccw(c3252.4,480.49) U9.23@3242.16,470.24 ; U9.23@3237.91,437 v1(3237.91,492.91) ; 2589.42,1445.08 cw(c2583.3,1441.55) 2590.13,1439.72 ccw(c2583.3,1441.55) 2589.42,1445.08 ; 2590.07,1445.73 ccw(c2593.6,1451.85) 2595.43,1445.02 cw(c2593.6,1451.85) 2590.07,1445.73
  Mid-Layer 1 w5: v1@2594.01,1431.07 cw(c2591.28,1425.63) 2597.37,1425.63 ; v1@2594.89,1438.05 ccw(c2613.54,1436) 2600.27,1422.73 ; v1(2597.37,1437.78) 2597.37,1425.63 ; v1@2599.86,1437.5 ccw(c2626.8,1434.54) 2607.63,1415.37 ; v1@2600.73,1431.07 ccw(c2603.46,1425.63) 2597.37,1425.63 ; v1@2604.83,1436.96 ccw(c2640.07,1433.08) 2615,1408 ; v1@3232.61,498.22 ccw(c3219.81,511.02) 3237.91,511.02 ccw(c3256.02,511.02) v1@3243.22,498.22 ; v1(3237.91,492.91) 3237.91,666 ccw(c3232.91,666) 3232.91,671 3222.21,671 cw(c3222.21,676) 3217.21,676 cw(c3222.21,676) 3222.21,681 3253.62,681 ccw(c3253.62,686) 3258.62,686 ccw(c3253.62,686) 3253.62,691 3222.21,691 cw(c3222.21,696) 3217.21,696 cw(c3222.21,696) 3222.21,701 3253.62,701 ccw(c3253.62,706) 3258.62,706 ccw(c3253.62,706) 3253.62,711 3242.91,711 cw(c3242.91,716) 3237.91,716 3237.91,749.09 2921,1066 2849,1066 2615,1300 2615,1408 ; 2597.37,1425.63 2615,1408
S_A1: U6.J4 U9.24 | length 1744.6
  Top Layer w5: U6.J4@2577.68,1490.48 cw(c2577.68,1475.13) 2588.54,1485.98 cw(c2599.39,1496.83) U6.J4@2584.04,1496.83 ; U6.J4@2577.68,1496.83 v1(2597.37,1477.15) ; U6.J4@2580.04,1490.89 cw(c2569.96,1473.43) v1@2589.94,1476.14 ; U6.J4@2583.63,1494.48 ccw(c2601.09,1504.56) v1@2598.38,1484.58 ; 2586.92,1486.91 cw(c2583.47,1480.93) v1@2590.13,1479.12 ; 2587.61,1487.6 ccw(c2593.59,1491.05) v1@2595.4,1484.39 ; 2588.73,1485.65 ccw(c2599.36,1491.79) v1@2597.71,1479.63 ; 2588.87,1485.79 cw(c2582.73,1475.16) v1@2594.89,1476.81 ; v1@2589.87,1477.15 ccw(c2571.76,1477.15) 2584.57,1489.95 ccw(c2597.37,1502.76) v1@2597.37,1484.65 ; v1@3264.11,486.29 cw(c3251.3,473.48) 3269.41,473.48 cw(c3287.52,473.48) v1@3274.71,486.29 ; U9.24@3265.17,470.24 ccw(c3254.92,480.49) 3269.41,480.49 ccw(c3283.89,480.49) U9.24@3273.65,470.24 ; U9.24@3269.41,437 v1(3269.41,491.59) ; v1@2590.13,1479.09 ccw(c2583.3,1480.92) 2589.42,1484.45 cw(c2583.3,1480.92) v1@2590.13,1479.09 ; 2590.07,1485.1 ccw(c2593.6,1491.22) 2595.43,1484.39 cw(c2593.6,1491.22) 2590.07,1485.1
  Mid-Layer 1 w5: v1@2597.37,1469.65 cw(c2597.37,1451.54) 2610.17,1464.35 cw(c2622.98,1477.15) v1@2604.87,1477.15 ; v1(2597.37,1477.15) 2617,1457.52 2617,1425 2625,1417 2625,1308 2851,1082 2931,1082 3269.41,743.59 3269.41,656 ccw(c3274.41,656) 3274.41,651 3282.47,651 cw(c3282.47,646) 3287.47,646 cw(c3282.47,646) 3282.47,641 3256.35,641 ccw(c3256.35,636) 3251.35,636 ccw(c3256.35,636) 3256.35,631 3282.47,631 cw(c3282.47,626) 3287.47,626 cw(c3282.47,626) 3282.47,621 3274.41,621 ccw(c3274.41,616) 3269.41,616 v1(3269.41,491.59) ; v1@3264.11,496.89 ccw(c3251.3,509.7) 3269.41,509.7 ccw(c3287.52,509.7) v1@3274.71,496.89
S_A2: U6.K3 U9.25 | length 1746.9
  Top Layer w5: U6.K3@2617.06,1451.11 cw(c2617.06,1435.76) 2627.91,1446.61 cw(c2638.76,1457.46) U6.K3@2623.41,1457.46 ; U6.K3@2617.06,1457.46 v1(2636.74,1437.78) ; U6.K3@2619.41,1451.52 cw(c2609.33,1434.06) v1@2629.31,1436.77 ; U6.K3@2623,1455.11 ccw(c2640.46,1465.19) v1@2637.75,1445.21 ; 2626.29,1447.54 cw(c2622.84,1441.56) v1@2629.5,1439.75 ; 2626.98,1448.23 ccw(c2632.96,1451.68) v1@2634.77,1445.02 ; 2628.1,1446.28 ccw(c2638.73,1452.42) v1@2637.08,1440.26 ; 2628.24,1446.42 cw(c2622.1,1435.79) v1@2634.26,1437.44 ; v1@2629.24,1437.78 ccw(c2611.13,1437.78) 2623.94,1450.58 ccw(c2636.74,1463.39) v1@2636.74,1445.28 ; v1@3295.6,485.6 cw(c3282.8,472.8) 3300.91,472.8 cw(c3319.01,472.8) v1@3306.21,485.6 ; U9.25@3296.66,470.24 ccw(c3286.42,480.49) 3300.91,480.49 ccw(c3315.39,480.49) U9.25@3305.15,470.24 ; U9.25@3300.91,437 v1(3300.91,490.91) ; 2628.79,1445.08 cw(c2622.67,1441.55) 2629.5,1439.72 ccw(c2622.67,1441.55) 2628.79,1445.08 ; 2629.44,1445.73 ccw(c2632.97,1451.85) 2634.8,1445.02 cw(c2632.97,1451.85) 2629.44,1445.73
  Mid-Layer 1 w5: v1@2631.44,1432.48 cw(c2618.63,1419.67) 2636.74,1419.67 cw(c2654.85,1419.67) v1@2642.04,1432.48 ; v1(2636.74,1437.78) 2636.74,1316.26 2858,1095 2943,1095 3300.91,737.09 3300.91,599 ccw(c3305.91,599) 3305.91,594 3315.24,594 cw(c3315.24,589) 3320.24,589 cw(c3315.24,589) 3315.24,584 3286.57,584 ccw(c3286.57,579) 3281.57,579 ccw(c3286.57,579) 3286.57,574 3315.24,574 cw(c3315.24,569) 3320.24,569 cw(c3315.24,569) 3315.24,564 3286.57,564 ccw(c3286.57,559) 3281.57,559 ccw(c3286.57,559) 3286.57,554 3295.91,554 cw(c3295.91,549) 3300.91,549 v1(3300.91,490.91) ; v1@3295.6,496.21 ccw(c3282.8,509.01) 3300.91,509.01 ccw(c3319.01,509.01) v1@3306.21,496.21
S_A3: U6.K5 U9.26 | length 1784.7
  Top Layer w5: U6.K5@2617.06,1529.85 cw(c2617.06,1514.5) 2627.91,1525.35 cw(c2638.76,1536.2) U6.K5@2623.41,1536.2 ; U6.K5@2617.06,1536.2 v1(2636.74,1516.52) ; U6.K5@2619.41,1530.26 cw(c2609.33,1512.8) v1@2629.31,1515.51 ; U6.K5@2623,1533.85 ccw(c2640.46,1543.93) v1@2637.75,1523.95 ; 2626.29,1526.28 cw(c2622.84,1520.3) v1@2629.5,1518.49 ; 2626.98,1526.97 ccw(c2632.96,1530.42) v1@2634.77,1523.76 ; 2628.1,1525.02 ccw(c2638.73,1531.16) v1@2637.08,1519 ; 2628.24,1525.16 cw(c2622.1,1514.53) v1@2634.26,1516.18 ; v1@2629.24,1516.52 ccw(c2611.13,1516.52) 2623.94,1529.32 ccw(c2636.74,1542.13) v1@2636.74,1524.02 ; v1@3327.1,485.1 cw(c3314.3,472.29) 3332.4,472.29 cw(c3350.51,472.29) v1@3337.7,485.1 ; U9.26@3328.16,470.24 ccw(c3317.92,480.49) 3332.4,480.49 ccw(c3346.89,480.49) U9.26@3336.64,470.24 ; v1@3328.65,483.91 cw(c3323.98,475.81) 3333.01,478.23 ; v1@3328.89,483.77 cw(c3326.34,478.95) 3331.61,477.54 ; 3331.8,478.23 cw(c3340.82,475.81) v1@3336.15,483.91 ; U9.26@3332.4,437 v1(3332.4,490.4) ; 3333.19,477.54 cw(c3338.46,478.95) v1@3335.91,483.77 ; 2628.79,1523.82 cw(c2622.67,1520.29) 2629.5,1518.46 ccw(c2622.67,1520.29) 2628.79,1523.82 ; 2629.44,1524.47 ccw(c2632.97,1530.59) 2634.8,1523.76 cw(c2632.97,1530.59) 2629.44,1524.47
  Mid-Layer 1 w5: v1@2636.74,1509.02 cw(c2636.74,1490.91) 2649.54,1503.72 cw(c2662.35,1516.52) v1@2644.24,1516.52 ; v1(2636.74,1516.52) 2656,1497.26 2656,1431 2648,1423 2648,1324 2864,1108 2957,1108 3332.4,732.6 3332.4,706 ccw(c3337.4,706) 3337.4,701 3350.96,701 cw(c3350.96,696) 3355.96,696 cw(c3350.96,696) 3350.96,691 3337.4,691 ccw(c3337.4,686) 3332.4,686 v1(3332.4,490.4) ; v1@3327.1,495.7 ccw(c3314.3,508.51) 3332.4,508.51 ccw(c3350.51,508.51) v1@3337.7,495.7
S_A4: U6.P1 U9.29 | length 1578.9
  Top Layer w5: U6.P1@2770.89,1378.72 ccw(c2789.29,1378.72) 2776.28,1365.72 ; U6.P1@2771.25,1373.28 cw(c2767.75,1367.47) 2774.54,1367.47 ; U6.P1@2774.54,1378.72 2774.54,1367.46 ; U6.P1@2775.89,1378.72 ccw(c2806.36,1378.72) 2784.82,1357.18 ; U6.P1@2777.82,1373.28 ccw(c2781.33,1367.47) 2774.54,1367.47 ; U6.P1@2780.89,1378.72 ccw(c2823.43,1378.72) 2793.35,1348.65 ; U9.29@3328.16,930.24 ccw(c3317.92,940.49) 3332.4,940.49 ccw(c3346.89,940.49) U9.29@3336.64,930.24 ; U9.29@3332.4,897 3332.4,975.6 3095.5,1212.5 cw(c3099.03,1216.04) 3095.5,1219.57 3102.39,1226.47 ccw(c3098.86,1230) 3102.39,1233.54 ccw(c3098.86,1230) 3095.32,1233.54 3074.46,1212.68 cw(c3070.93,1216.22) 3067.39,1212.68 cw(c3070.93,1216.22) 3067.39,1219.75 3088.25,1240.61 ccw(c3084.71,1244.14) 3088.25,1247.68 ccw(c3084.71,1244.14) 3081.18,1247.68 3060.32,1226.82 cw(c3056.78,1230.36) 3053.25,1226.82 cw(c3056.78,1230.36) 3053.25,1233.89 3074.11,1254.75 ccw(c3070.57,1258.29) 3074.11,1261.82 ccw(c3070.57,1258.29) 3067.04,1261.82 3060.14,1254.93 cw(c3056.61,1258.46) 3053.07,1254.93 3046,1262 3039,1262 ccw(c3039,1257) 3034,1257 3034,1247.25 cw(c3029,1247.25) 3029,1242.25 cw(c3029,1247.25) 3024,1247.25 3024,1276.75 ccw(c3019,1276.75) 3019,1281.75 ccw(c3019,1276.75) 3014,1276.75 3014,1247.25 cw(c3009,1247.25) 3009,1242.25 cw(c3009,1247.25) 3004,1247.25 3004,1276.75 ccw(c2999,1276.75) 2999,1281.75 ccw(c2999,1276.75) 2994,1276.75 2994,1247.25 cw(c2989,1247.25) 2989,1242.25 cw(c2989,1247.25) 2984,1247.25 2984,1276.75 ccw(c2979,1276.75) 2979,1281.75 ccw(c2979,1276.75) 2974,1276.75 2974,1247.25 cw(c2969,1247.25) 2969,1242.25 cw(c2969,1247.25) 2964,1247.25 2964,1276.75 ccw(c2959,1276.75) 2959,1281.75 ccw(c2959,1276.75) 2954,1276.75 2954,1247.25 cw(c2949,1247.25) 2949,1242.25 cw(c2949,1247.25) 2944,1247.25 2944,1276.75 ccw(c2939,1276.75) 2939,1281.75 ccw(c2939,1276.75) 2934,1276.75 2934,1247.25 cw(c2929,1247.25) 2929,1242.25 cw(c2929,1247.25) 2924,1247.25 2924,1276.75 ccw(c2919,1276.75) 2919,1281.75 ccw(c2919,1276.75) 2914,1276.75 2914,1247.25 cw(c2909,1247.25) 2909,1242.25 cw(c2909,1247.25) 2904,1247.25 2904,1276.75 ccw(c2899,1276.75) 2899,1281.75 ccw(c2899,1276.75) 2894,1276.75 2894,1267 cw(c2889,1267) 2889,1262 2880,1262 2774.54,1367.46